# Altium PCB STM_BLUEPILL.PcbDoc
Units mm, origin at the board's own origin, x right, y up, seen from the top; angles counter-clockwise.
Board outline 53.31 x 22.32 mm, 4 copper layers (Top Layer 1, Top Layer, Bottom Layer, Bottom Layer 1), stack 1.57 mm thick; 29 components, 49 nets, 158 pads, 33 vias.
Unrouted connection lines stored in the file: 12.
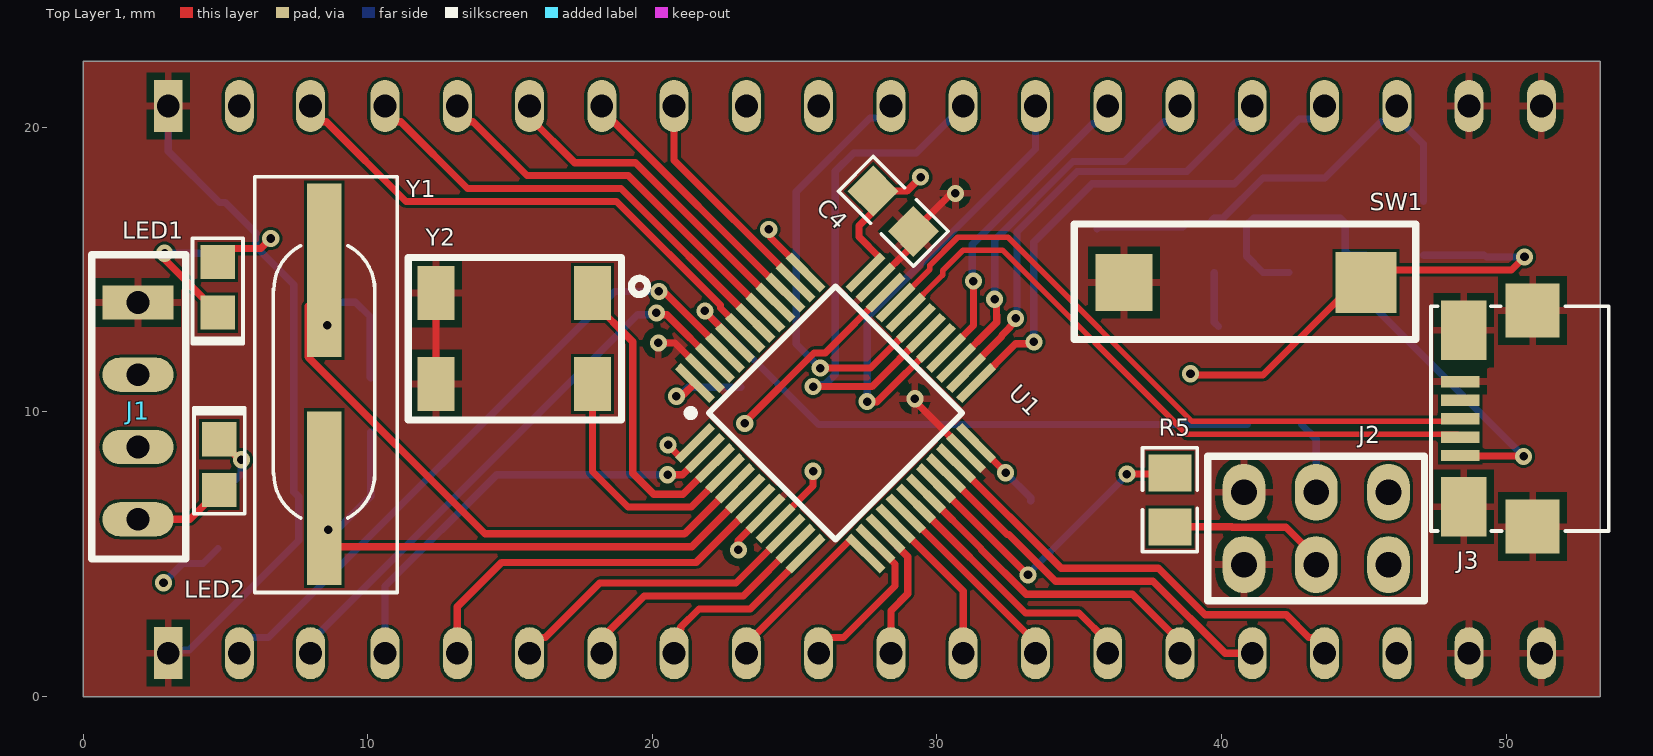
[diagram p0: Top Layer 1 view]
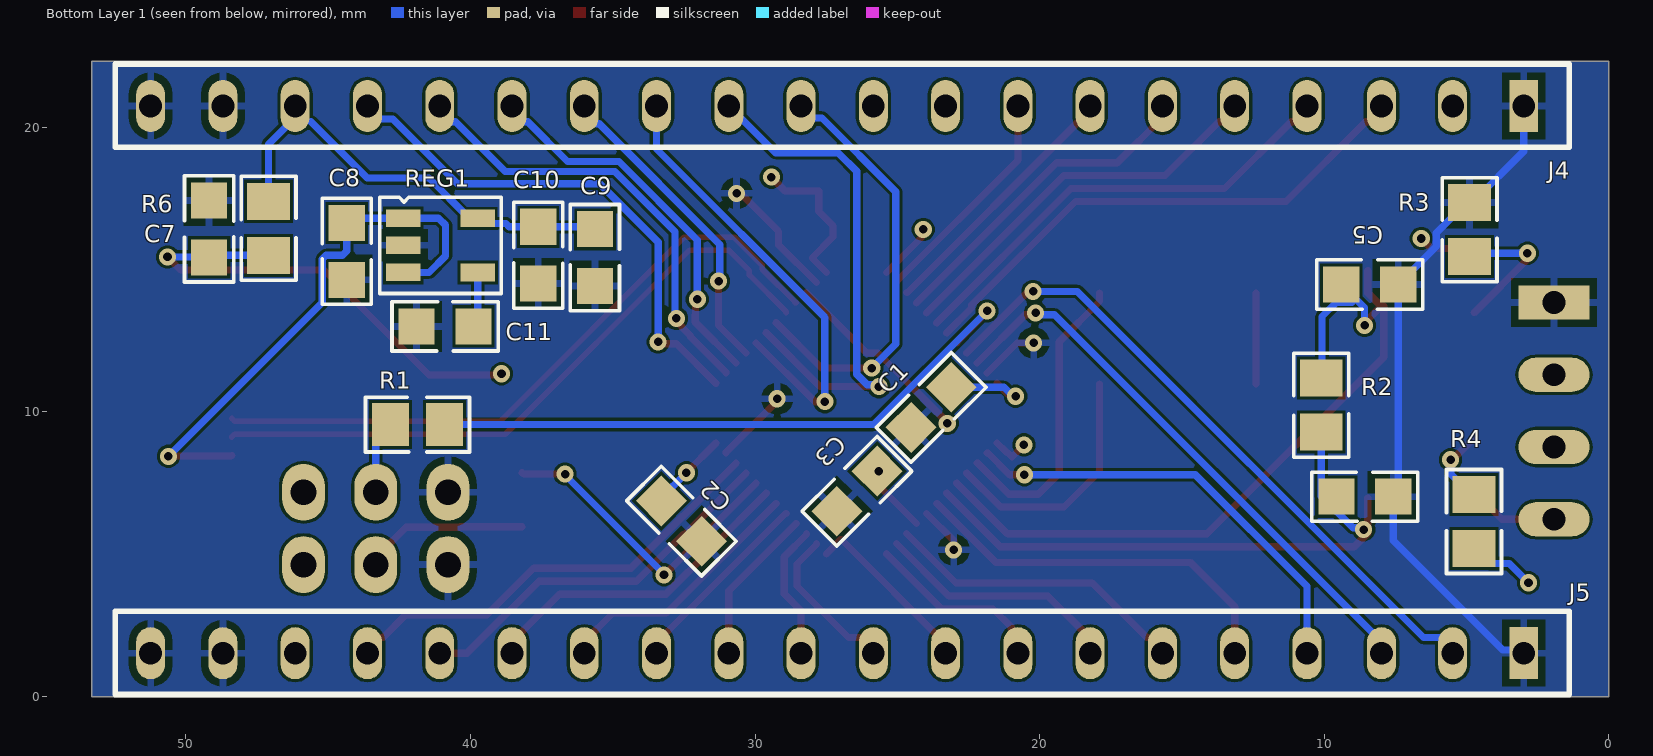
[diagram p1: Bottom Layer 1 view, seen from below]
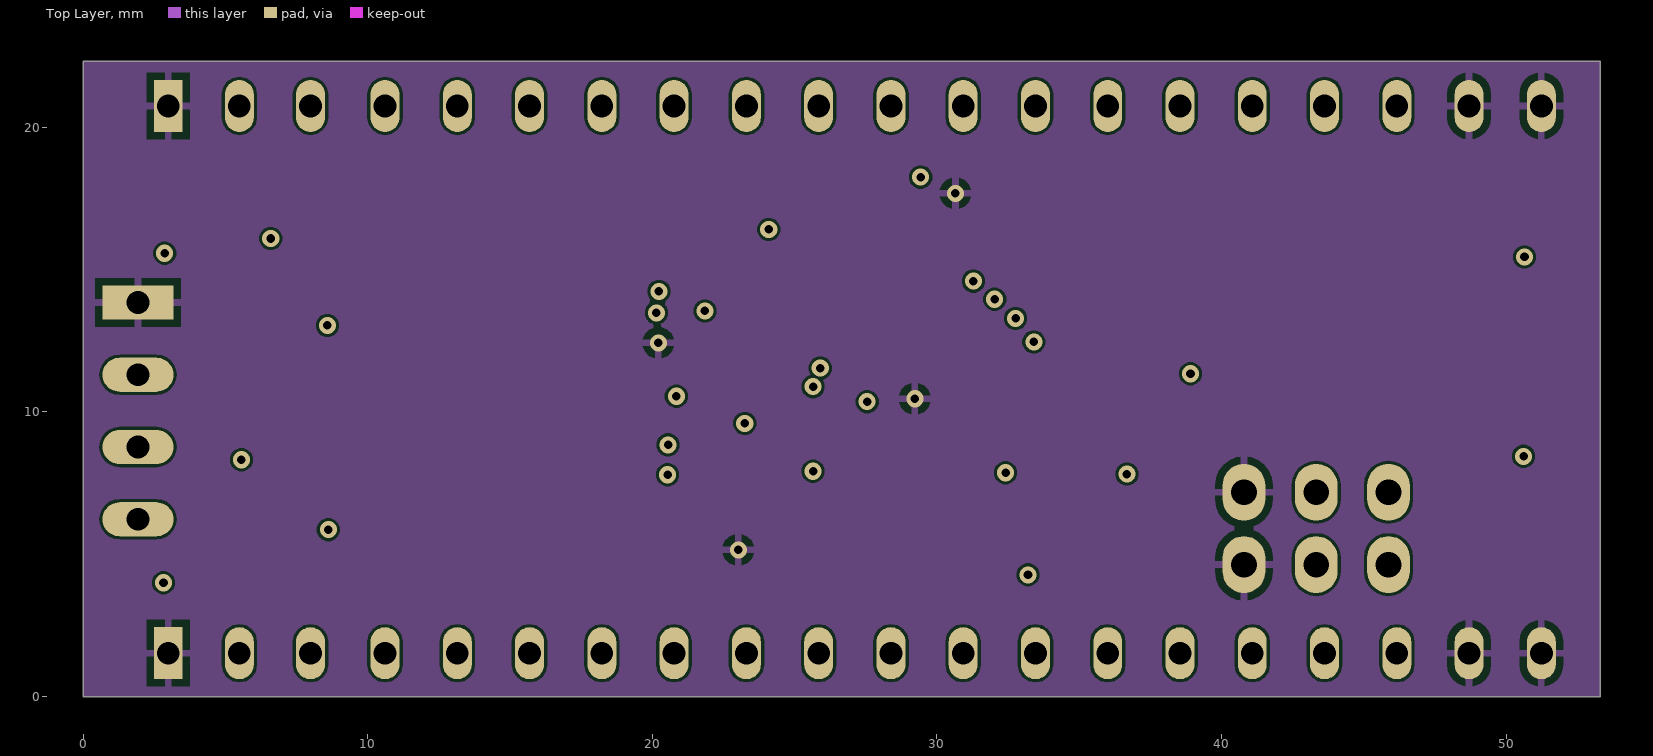
[diagram p2: Top Layer]
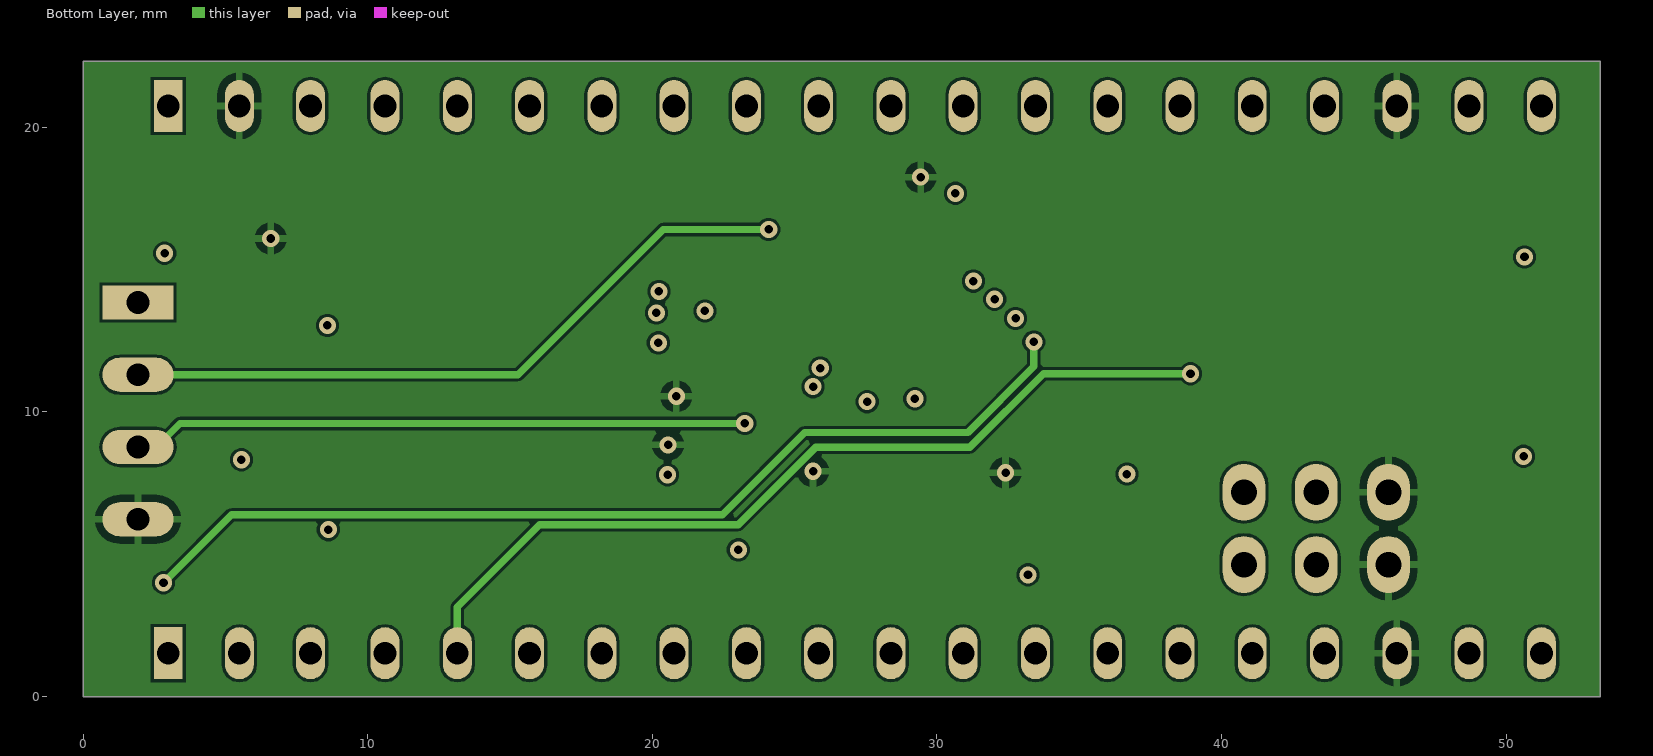
[diagram p3: Bottom Layer]
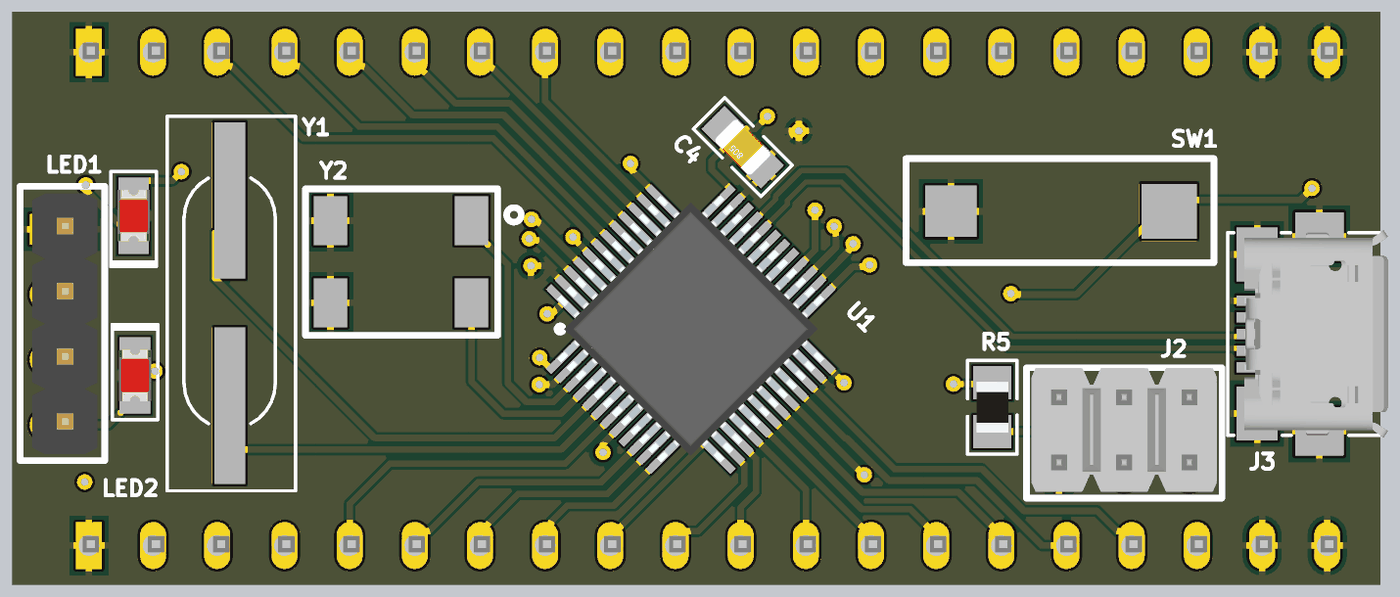
[diagram p4: 3D render of the assembled board from above, using the file's embedded part models]
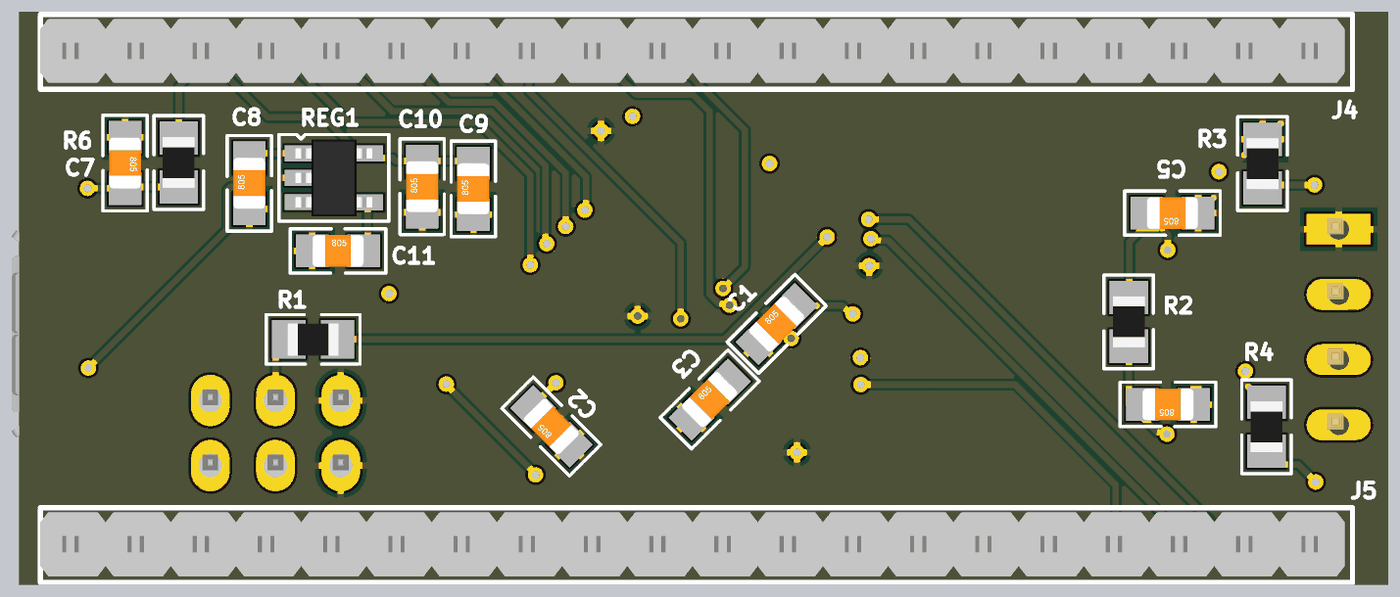
[diagram p5: 3D render of the assembled board from below, using the file's embedded part models]

## Layer stack, top to bottom
Top Solder: solder mask 0.0102, Solder Resist, Dk 3.5
Top Layer 1: signal copper 0.035
Dielectric 2: prepreg 0.0994, PP-006, Dk 4.1
Top Layer: signal copper 0.018
Dielectric 1: dielectric 1.265, FR-4, Dk 4.8
Bottom Layer: signal copper 0.018
Dielectric 3: prepreg 0.0994, PP-006, Dk 4.1
Bottom Layer 1: signal copper 0.035
Bottom Solder: solder mask 0.0102, Solder Resist, Dk 3.5

## Board outline
0,0 53.309,0 53.309,22.324 0,22.324

## Design rules (kind name [scope] priority, off if disabled: settings)
Clearance [All] p1: gap=0.1 ignorepadtopadclearanceinfootprint=TRUE
DiffPairsRouting DiffPair_90DiffPairsRouting [InDifferentialPairClass('DII90')] p1: maxlimit=0.254 minlimit=0.254 mostfreqgap=0.254 toplayer_minwidth=0.2 toplayer_maxwidth=0.2 toplayer_prefwidth=0.2 midlayer1_minwidth=0.2 midlayer1_maxwidth=0.2 midlayer1_prefwidth=0.2 midlayer2_minwidth=0.2 midlayer2_maxwidth=0.2 midlayer2_prefwidth=0.2 bottomlayer_minwidth=0.2 bottomlayer_maxwidth=0.2 bottomlayer_prefwidth=0.2 maxuncoupledlength=12.7
DiffPairsRouting [All] p2: maxlimit=0.254 minlimit=0.254 mostfreqgap=0.254 toplayer_minwidth=0.381 toplayer_maxwidth=0.381 toplayer_prefwidth=0.381 midlayer1_minwidth=0.381 midlayer1_maxwidth=0.381 midlayer1_prefwidth=0.381 midlayer2_minwidth=0.381 midlayer2_maxwidth=0.381 midlayer2_prefwidth=0.381 bottomlayer_minwidth=0.381 bottomlayer_maxwidth=0.381 bottomlayer_prefwidth=0.381 maxuncoupledlength=12.7
MatchedLengths DiffPair_90MatchedLengths [InDifferentialPairClass('DII90')] p1: tolerance=25.4 checknetsindiffpair=FALSE checkdiffpairvsdiffpair=TRUE checkxsignals=TRUE checkothers=TRUE
MinimumSolderMaskSliver [All] p1: minsoldermaskwidth=0.01
PolygonConnect [All] p1: connectstyle=Relief reliefconductorwidth=0.254 reliefentries=4 polygonreliefangle="90 Angle" airgapwidth=0.254
RoutingVias [All] p1: holewidth=0.3 width=0.6 viastyle="Through Hole" minholewidth=0.3 minwidth=0.6 maxholewidth=0.3 maxwidth=0.6
SilkToSilkClearance [All] p1: silktosilkclearance=0.1
SilkToSolderMaskClearance [IsPad] p1: minsilkscreentomaskgap=0.01 clearancetoexposedcopper=TRUE
SolderMaskExpansion [All] p1: expansion=0.102 istentingtop=FALSE
Width ALL [All] p1: maxlimit=0.254 minlimit=0.254 preferedwidth=0.254
Width 3.3V [InNet('+3V3')] p2: maxlimit=0.3 minlimit=0.3 preferedwidth=0.3
Width 5V [InNet('+5V')] p3: maxlimit=0.4 minlimit=0.4 preferedwidth=0.4 checkconnectedcopper=TRUE
26 further rules are at their usual default settings.

## Classes and differential pairs
differential pair class DII90: D
component class "[2]- Connector_Page": C8 C9 C10 C11 J3 J4 J5 REG1
component class [1]-Controller_Page: C1 C2 C3 C4 C5 C7 J1 J2 LED1 LED2 R1 R2 R3 R4 R5 R6 SW1 U1 Y1 Y2
differential pair D: +D_P -D_N

## Components (designator, comment, footprint, x,y, rotation, side; value= is the part's Value field where it differs from the comment)
C1 "0.1uF" CAP_0805 23.811,10.163 r135 bottom
C2 "0.1uF" CAP_0805 32.587,6.165 r45 bottom
C3 "0.1uF" CAP_0805 26.419,7.217 r135 bottom
C4 "0.1uF" CAP_0805 28.466,17.055 r135 top
C5 "22pF" CAP_0805 8.397,14.481 r0 bottom
C6 "22pF" CAP_0805 8.57,7.024 r0 bottom
C7 "0.1uF" CAP_0805 49.188,16.434 r270 bottom
C8 "0.1uF" CAP_0805 44.348,15.645 r90 bottom
C9 "0.1uF" CAP_0805 35.626,15.428 r90 bottom
C10 "1uF" CAP_0805 37.618,15.512 r90 bottom
C11 "22pF" CAP_0805 40.895,13.008 r180 bottom
J1 "4X1 Bergstrip" CON4_100_40D72_TH_ST_MALE 1.922,13.849 r0 top
J2 "2X3 Berg Strip" CON6_100_59D78_TH_ST_DUPLICATE 45.87,7.178 r180 top
J3 "MICRO USB2.0" CON_10118192-0001LF_SMD 49.663,9.769 r90 top
J4 "20X1 Bergstrip" CON20_100_40D72_TH_ST 2.983,20.756 r270 bottom
J5 "20X1 Bergstrip" CON20_100_40D72_TH_ST 2.983,1.522 r270 bottom
LED1 "RED LED" LED_0805 4.724,14.381 r90 top
LED2 "RED LED" LED_0805 4.779,8.151 r270 top
R1 "10K" RES_0805 41.864,9.559 r180 bottom
R2 "10Mohm" RES_0805 10.1,10.242 r90 bottom
R3 "1K" RES_0805 4.889,16.41 r90 bottom
R4 "1K" RES_0805 4.733,6.151 r270 bottom
R5 "10K" RES_0805 38.189,6.913 r90 top
R6 "10K" RES_0805 47.099,16.455 r270 bottom
REG1 "RT9193-33GB" SOT23-5 41.056,15.854 r270 bottom
SW1 "TACT SWITCH" SW_342_SMD 36.578,14.551 r180 top
U1 "STM32F103C8T6" LQFP-48_19.6_393_58X11_SMD 26.437,9.962 r45 top
Y1 "8MHz" XTAL_314_240X47_SMD 8.468,14.976 r270 top
Y2 "32.768KHz" "XTAL_MC-405 32.7680K-G3" 17.895,10.984 r180 top

## Footprints (in the part's own frame and the unit in brackets; to place one, negate y for a bottom-side part, rotate by r counter-clockwise, add the part's x,y. Pads: shape width x height; smd on the part's side, far side on the other; paste and mask are expansions set on the pad)
CAP_0805 [mm] "Ceramic Capacitor"
  rect 1.27x1.27 smd mask+0.076: 1(-1,0) 2(1,0)
  silkscreen extent -1.86,-0.86 1.86,0.86, body extent -1,-0.62 1,0.63, height 0.78
CON4_100_40D72_TH_ST_MALE [mm] "Berg Strip"
  rect 2.5x1.2 hole 0.8: 1(0,0)
  oval 2.5x1.2 hole 0.8: 2(0,-2.54) 3(0,-5.08) 4(0,-7.62)
  silkscreen extent -1.63,-9.02 1.68,1.68, body extent -1.14,-8.76 1.4,1.4, height 8.55
CON6_100_59D78_TH_ST_DUPLICATE [mm] "Berg strip"
  oval 1.5x2 hole 0.9: 1(0,0) 2(0,2.54) 3(2.54,0) 4(2.54,2.54) 5(5.08,0) 6(5.08,2.54)
  silkscreen extent -1.27,-1.27 6.35,3.81, body extent -1.07,-1.27 6.15,3.56, height 8.18
CON20_100_40D72_TH_ST [mil] "Berg strip"
  rect 72x40 hole 31.5: 1(0,0)
  oval 72x40 hole 31.5: 2(0,-98.43) 3(0,-196.85) 4(0,-300) 5(0,-400) 6(0,-500) 7(0,-600) 8(0,-700) 9(0,-800) 10(0,-900) 11(0,-1000) 12(0,-1100) 13(0,-1200) 14(0,-1300) 15(0,-1400) 16(0,-1500) 17(0,-1600) 18(0,-1700) 19(0,-1800) 20(0,-1900)
  silkscreen extent -58,-1949 57,63, body extent -51,-1949 47,51, height 323
CON_10118192-0001LF_SMD [mm] "USB2.0 MICRO"
  rect 0.4x1.35 smd: 1(-1.3,1.275) 2(-0.65,1.275) 3(0,1.275) 4(0.65,1.275) 5(1.3,1.275)
  rect 2.1x1.6 smd: 6(-3.1,1.15) 7(3.1,1.15)
  rect 1.9x1.9 smd: 8(-3.8,-1.275) 9(3.8,-1.275)
  silkscreen extent -3.95,-3.94 3.95,2.3, body extent -4.04,-3.94 4.04,1.66, height 2.81
LED_0805 [mm] "LED"
  rect 1.2x1.2 smd mask+0.076: A(0.889,0) K(-0.889,0)
  silkscreen extent -1.99,-0.89 1.73,0.89, body extent -1.01,-0.62 1.01,0.63, height 1.1
LQFP-48_19.6_393_58X11_SMD [mm] "48LQFP"
  rect 1.7x0.3 smd mask+0.076: 1(-4.238,2.75) 2(-4.238,2.25) 3(-4.238,1.75) 4(-4.238,1.25) 5(-4.238,0.75) 6(-4.238,0.25) 7(-4.238,-0.25) 8(-4.238,-0.75) 9(-4.238,-1.25) 10(-4.238,-1.75) 11(-4.238,-2.25) 12(-4.238,-2.75) 25(4.238,-2.75) 26(4.238,-2.25) 27(4.238,-1.75) 28(4.238,-1.25) 29(4.238,-0.75) 30(4.238,-0.25) 31(4.238,0.25) 32(4.238,0.75) 33(4.238,1.25) 34(4.238,1.75) 35(4.238,2.25) 36(4.238,2.75)
  rect 0.3x1.7 smd mask+0.076: 13(-2.75,-4.238) 14(-2.25,-4.238) 15(-1.75,-4.238) 16(-1.25,-4.238) 17(-0.75,-4.238) 18(-0.25,-4.238) 19(0.25,-4.238) 20(0.75,-4.238) 21(1.25,-4.238) 22(1.75,-4.238) 23(2.25,-4.238) 24(2.75,-4.238) 37(2.75,4.238) 38(2.25,4.238) 39(1.75,4.238) 40(1.25,4.238) 41(0.75,4.238) 42(0.25,4.238) 43(-0.25,4.238) 44(-0.75,4.238) 45(-1.25,4.238) 46(-1.75,4.238) 47(-2.25,4.238) 48(-2.75,4.238)
  silkscreen extent -3.72,-3.15 3.15,3.72, body extent -4.5,-4.5 4.5,4.5, height 1.7
RES_0805 [mm] "Resister"
  rect 1.3x1.5 smd mask+0.076: 1(0.95,0) 2(-0.95,0)
  silkscreen extent -1.83,-0.97 1.83,0.97, body extent -1,-0.63 1,0.62, height 0.5
SOT23-5 [mm] "CASE: SOT"
  rect 0.62x1.22 smd mask+0.076: 1(-0.953,-1.31) 2(-0.003,-1.31) 3(0.947,-1.31) 4(0.952,1.31) 5(-0.953,1.31)
  silkscreen extent -1.69,-2.14 1.69,2.14, body extent -1.5,-1.5 1.5,1.5, height 1.41
SW_342_SMD [mm] "CASE: SMD"
  rect 2x2 smd: 1(0,0)
  rect 2.15x2.15 smd: 2(-8.5,0)
  silkscreen extent -10.25,-2.06 1.75,2, body extent -7.17,-1.79 -1.17,1.71, height 2.4
XTAL_314_240X47_SMD [mm] "CASE: TH"
  rect 6.096x1.2 smd: 1(0,0) 2(8,0)
  silkscreen extent -3.29,-2.44 11.32,2.57, body extent -2.99,-2.27 10.9,2.41, height 3.05
"XTAL_MC-405 32.7680K-G3" [mm] "Crystal"
  rect 1.3x1.9 smd: 1(0,-3.2) 2(5.5,-3.2) 3(5.5,0) 4(0,0)
  silkscreen extent -1.93,-4.44 6.48,1.27, body extent -1.02,-4.44 6.48,1.27, height 3.6

## Part data
C1 C2 C3 C4 C7 C8 C9: library part CAP_0.1uF-50V-5%-0805, "0.1µF ±5% 50V Ceramic Capacitor X7R 0805 (2012 Metric)", Case/Package="0805 (2012 Metric)", Manufacturer=KEMET, Manufacturing Part Number=C0805C104J5RACTU, Supplier Part Number-1=399-1171-1-ND, Supplier-1=Digikey
C5 C6 C11: library part CAP_22pF-50V-5%-0805, "22pF ±5% 50V Ceramic Capacitor C0G, NP0 0805 (2012 Metric)", Case/Package=0805, Manufacturer=KEMET, Manufacturer Part Number=C0805C220J5GACTU, Supplier Part Number-1=399-1113-1-ND, Supplier-1=Digikey
C10: library part CAP_1uF-50V-5%-0805, "1µF ±5% 50V Ceramic Capacitor X7R 0805 (2012 Metric)", Case/Package="0805 (2012 Metric)", Manufacturer=Yageo, Manufacturing Part Number=CC0805JKX7R9BB105, Supplier Part Number-1=311-3498-1-ND, Supplier-1=Digikey
J1: library part CON-BS-PLG_4X1-100-TH-ST, "4 pin, 1 row, 2.54mm pitch bergstrip", Case/Package=TH, Manufacturer=NA, Manufacturing Part Number=NA, Supplier Part Number-1=NA, Supplier-1=NA
J2: library part CON-BS-PLG_2X3-100-TH-ST, "6 pin, 2 row, 2.54mm pitch bergstrip", Case/Package=TH, Manufacturer=NA, Manufacturer Part Number=NA, Supplier Part Number-1=NA, Supplier-1=NA
J3: library part CON-USB_10118192-0002LF-SMD, "USB - micro B USB 2.0 Receptacle Connector 5 Position Surface Mount, Right Angle", Case/Package=SMD, Manufacturer="Amphenol ICC (FCI)", Manufacturing Part Number=10118192-0002LF, Supplier Part Number-1=609-5379-1-ND, Supplier-1=Digikey
J4 J5: library part CON-BS-PLG_20X1-100-TH-ST, "20 pin, 1 row, 2.54mm pitch bergstrip", Case/Package=TH, Manufacturer=NA, Manufacturing Part Number=NA, Supplier Part Number-1=NA, Supplier-1=NA
LED1 LED2: library part LED-RED_10mA-0805, "Red 621nm LED Indication - Discrete 2V 0805 (2012 Metric)", Case/ Package=0805, Manufacturer="Lite-On Inc.", Manufacturer Part Number=LTST-C170EKT, Supplier Part Number-1=160-1178-1-ND, Supplier-1=Digikey
R1 R5 R6: library part RES_10K-0.125W-1%-0805, "10 kOhms ±1% 0.125W, 1/8W Chip Resistor 0805 (2012 Metric) Moisture Resistant Thick Film", Case/Package=0805, Manufacturer=Yageo, Manufacturing Part Number=RC0805FR-0710KL, Supplier Part Number-1=311-10.0KCRCT-ND, Supplier-1=Digikey
R2: library part RES_10MOHM-0.125W-1%-0805, "10 MOhms ±1% 0.125W, 1/8W Chip Resistor 0805 (2012 Metric) Automotive AEC-Q200, High Voltage Thick Film", Case/Package="0805 (2012 Metric)", Manufacturer="Rohm Semiconductor", Manufacturing Part Number=KTR10EZPF1005, Supplier Part Number-1=RHM10.0MAHCT-ND, Supplier-1=Digikey
R3 R4: library part RES_1K-0.125W-1%-0805, "1 kOhms ±1% 0.125W, 1/8W Chip Resistor 0805 (2012 Metric) Moisture Resistant Thick Film", Case/Package=0805, Manufacturer=垈㎵á, Manufacturer Part Number=RC0805FR-071KL, Supplier Part Number-1=311-1.00KCRCT-ND, Supplier-1=Digikey
REG1: library part REG_3.3V-5.5V-0.3A-SOT-23-5, "Linear Voltage Regulator IC 1 Output 300mA SOT-23-5", Case/ Package=SOT-23-5, Manufacturer="Richtek USA Inc.", Supplier Part Number-1=1028-1014-1-ND, Manufacturer Part Number=RT9193-33GB, Supplier-1=Digikey
SW1: library part SW_KSR223GLFG-SMD, "Tactile Switch SPST-NO Top Actuated Surface Mount", Case/Package=SMD, Manufacturer=C&K, Manufacturing Part Number=KSR223GLFG, Supplier Part Number-1=401-1704-1-ND, Supplier-1=Digikey
U1: library part "IC-STM32F103C8T6 _1", "ARM® Cortex®-M3 STM32F1 Microcontroller IC 32-Bit 72MHz 64KB (64K x 8) FLASH", Case/Package=48-LQFP, Manufacturer=STMicroelectronics, Supplier Part Number-1=497-6063-ND, Manufacturer Part Number=STM32F103C8T6, Supplier-1=Digikey
Y1: library part XTAL_8MHZ-LFXTAL030234, "Crystals 8MHz 22pF -20C 70C", Case/Package=SMD, Manufacturer="IQD Frequency Products", Manufacturing Part Number=LFXTAL030234Reel, Supplier Part Number-1=449-LFXTAL030234REEL, Supplier-1=Mouser
Y2: library part "XTAL_32.768KHz-MC-405 32.7680K-G3", "Crystals SMD AT XTL MHZ +/-50PPM 12.5 PF 250 T/R", Case/Package=SMD, Manufacturer=Epson, Manufacturing Part Number="MC-405 32.7680K-G3: ROHS", Supplier Part Number-1=732-MC405327680KG3RS, Supplier-1=Mouser

## Via types
v1: diameter 0.6, hole 0.3, Top Layer 1 to Bottom Layer 1, 33 vias

## Nets (pads, with @x,y where several pads share a name; then routed paths per layer and width w, separated by ;. In a path a pad name is that pad's centre, name@x,y a point inside that pad or via, vN(x,y) a via of type N, cw(c..) or ccw(c..) an arc to the next point about the centre after c; other vN are vias at no path point)
+3V3: C1.2 C2.2 C3.2 C4.2 C9.2 C10.2 J1.4 J2.1 J2.2 J4.2 J4.18 J5.18 LED1.A LED2.A R6.2 REG1.5 U1.1 U1.9 U1.24 U1.36 U1.48 | length 36
  Top Layer 1 w0.254: J1.4 3.746,6.229 LED2.A ; LED1.A 5.197,15.743 6.232,15.743 v1(6.586,16.097) ; v1(20.549,8.845) 20.974,8.42 21.126,8.573 21.159,8.573 U1.1 ; v1(20.842,10.553) 20.908,10.619 21.101,10.619 U1.48 ; U1.9 25.645,7.402 v1(25.645,7.918) ; U1.36 27.984,15.398 27.984,15.431 27.257,16.158 27.257,16.542 27.759,17.044 C4.2 28.935,17.762 v1(29.427,18.254) ; U1.24 31.378,8.904 32.411,7.872 v1(32.411,7.866)
  Bottom Layer 1 w0.254: v1(20.842,10.553) 20.936,10.553 21.253,10.87 C1.2 ; v1(32.411,7.866) 33.294,6.983 C2.2 ; C9.2 35.71,16.512 C10.2 38.639,16.512 38.755,16.628 39.568,16.628 REG1.5 40.046,16.807 41.461,18.221 43.628,18.221 45.611,20.204 ; J4.18 46.163,20.35 47.099,19.414 R6.2
+5V: C8.2 J3.1 REG1.1 REG1.3 | length 19.8
  Top Layer 1 w0.254: J3.1 48.401,8.456 50.604,8.456 v1(50.618,8.442)
  Bottom Layer 1 w0.254: REG1.3 41.458,14.907 40.875,15.49 40.875,16.56 41.122,16.807 REG1.1 44.187,16.807 C8.2 44.348,15.656 44.497,15.507 45.077,15.507 45.21,15.374 45.21,13.85 v1(50.618,8.442)
BOOT0: J2.3 R1.2 | length 2.6
  Bottom Layer 1 w0.254: R1.2 43.33,9.043 J2.3
BOOT1: J2.4 R5.2 | length 5.8
  Top Layer 1 w0.254: R5.2 40.365,5.963 40.377,5.951 42.267,5.951 43.33,4.888 J2.4
D_N: J3.2 U1.32 | length 23.2
  Top Layer 1 w0.2: U1.32 28.903,13.522 30.199,14.818 30.199,14.966 30.922,15.689 32.306,15.689 38.778,9.217 48.29,9.217 J3.2
D_P: J3.3 U1.33 | length 23.6
  Top Layer 1 w0.2: U1.33 28.582,13.843 29.745,15.006 29.745,15.154 30.734,16.143 32.494,16.143 38.966,9.671 48.29,9.671 J3.3
GND: C1.1 C2.1 C3.1 C4.1 C5.1 C6.1 C7.1 C8.1 C9.1 C10.1 C11.1 J1.1 J2.5 J2.6 J3.5 J3.6 J3.7 J3.8 J3.9 J4.1 J4.19 J4.20 J5.1 J5.19 J5.20 R3.1 REG1.2 SW1.1 U1.8 U1.23 U1.35 U1.47 Y2.2 Y2.3 | length 37.5
  Top Layer 1 w0.254: Y2.3 Y2.2 ; v1(20.21,12.429) 20.214,12.425 20.792,12.425 U1.47 ; v1(23.02,5.154) 23.02,5.484 U1.8 ; U1.35 29.173,15.88 C4.1 30.51,17.685 v1(30.65,17.685) ; v1(29.224,10.466) 29.224,10.39 31.025,8.589 U1.23
  Bottom Layer 1 w0.254: J5.1 3.098,1.637 3.723,1.637 7.57,5.484 C6.1 7.397,7.197 C5.1 6.059,15.819 6.059,16.29 4.989,17.36 R3.1 4.789,17.36 2.983,19.166 J4.1
NetC11_2: C11.2 REG1.4 | length 2
  Bottom Layer 1 w0.254: REG1.4 39.746,13.157 C11.2
NetLED1_K: LED1.K R3.2 | length 4.9
  Top Layer 1 w0.254: v1(2.86,15.58) 2.849,15.569 2.849,15.367 LED1.K
  Bottom Layer 1 w0.254: v1(2.86,15.58) 4.769,15.58 R3.2
NetLED2_K: LED2.K R4.2 | length 2.4
  Top Layer 1 w0.254: LED2.K 5.497,8.322 v1(5.556,8.322)
  Bottom Layer 1 w0.254: R4.2@4.926,7.302 5.026,7.302 5.549,7.825 5.549,8.315 v1(5.556,8.322)
NetR1_1: R1.1 U1.44 | length 22.3
  Top Layer 1 w0.254: v1(21.847,13.551) 21.847,13.521 22.91,12.458 U1.44
  Bottom Layer 1 w0.254: v1(21.847,13.551) 25.839,9.559 R1.1
NetR5_1: R5.1 U1.20 | length 11.1
  Top Layer 1 w0.254: U1.20 33.183,4.277 v1(33.201,4.277) ; v1(36.678,7.817) 38.143,7.817 R5.1
  Bottom Layer 1 w0.254: v1(33.201,4.277) 33.201,4.309 36.678,7.785 v1(36.678,7.817)
NRST: C7.2 J5.5 R6.1 SW1.2 U1.7 | length 61.3
  Top Layer 1 w0.254: J5.5 13.143,3.154 14.704,4.715 21.544,4.715 U1.7 ; v1(38.912,11.345) 38.953,11.304 41.462,11.304 45.152,14.994 50.195,14.994 v1(50.65,15.449)
  Bottom Layer w0.254: J5.5 13.143,3.149 16.032,6.038 23.02,6.038 25.741,8.759 31.157,8.759 33.743,11.345 v1(38.912,11.345)
  Bottom Layer 1 w0.254: R6.1 C7.2@49.223,15.505 ; C7.2@49.317,15.449 v1(50.65,15.449)
PA0: J5.6 U1.10 | length 10.9
  Top Layer 1 w0.254: J5.6 15.683,1.722 16.035,2.074 16.235,2.074 18.148,3.987 22.937,3.987 U1.10
PA1: J5.7 U1.11 | length 8.7
  Top Layer 1 w0.254: J5.7 18.223,2.045 19.711,3.533 23.19,3.533 U1.11
PA2: J5.8 U1.12 | length 6.5
  Top Layer 1 w0.254: J5.8 20.763,2.135 20.998,2.37 20.998,2.442 21.635,3.079 23.443,3.079 U1.12
PA3: J5.9 U1.13 | length 6.2
  Top Layer 1 w0.254: J5.9 23.303,1.857 26.962,5.516 26.994,5.516 U1.13
PA4: J5.10 U1.14 | length 5.6
  Top Layer 1 w0.254: J5.10 25.843,1.722 26.195,2.074 26.717,2.074 28.523,3.88 28.523,4.661 27.843,5.342 U1.14
PA5: J5.11 U1.15 | length 4.8
  Top Layer 1 w0.254: U1.15 28.196,5.695 28.977,4.914 28.977,3.609 28.383,3.015 J5.11
PA6: J5.12 U1.16 | length 5.5
  Top Layer 1 w0.254: U1.16 30.923,3.708 J5.12
PA7: J5.13 U1.17 | length 6.8
  Top Layer 1 w0.254: U1.17 28.93,6.435 33.463,1.902 J5.13
PA8: J4.13 U1.29 | length 16.1
  Top Layer 1 w0.254: v1(27.548,10.362) 27.898,10.362 U1.29
  Bottom Layer 1 w0.254: v1(27.548,10.362) 27.548,13.326 33.463,19.241 J4.13
PA9: J4.12 U1.30 | length 18.3
  Top Layer 1 w0.254: v1(25.646,10.891) 27.72,10.891 U1.30
  Bottom Layer 1 w0.254: v1(25.646,10.891) 25.713,10.957 26.058,10.957 26.426,11.326 26.426,18.459 27.073,19.106 29.273,19.106 J4.12
PA10: J4.11 U1.31 | length 15.2
  Top Layer 1 w0.254: v1(25.899,11.544) 27.665,11.544 U1.31
  Bottom Layer 1 w0.254: v1(25.899,11.544) 25.054,12.389 25.054,17.737 27.65,20.333 28.031,20.333 28.383,20.685 J4.11
PA11: J4.10
PA12: J4.9
PA15: J4.8 U1.38 | length 8
  Top Layer 1 w0.254: J4.8 20.763,18.851 25.031,14.582 U1.38
PB0: J5.14 U1.18 | length 9.2
  Top Layer 1 w0.254: U1.18 33.11,2.935 34.996,2.935 36.003,1.928 J5.14
PB1: J5.15 U1.19 | length 11.5
  Top Layer 1 w0.254: U1.19 31.552,5.2 31.552,5.18 33.137,3.596 36.875,3.596 38.543,1.928 J5.15
PB3: J4.7 U1.39 | length 9.3
  Top Layer 1 w0.254: J4.7 18.223,20.556 18.575,20.204 18.638,20.204 24.645,14.196 U1.39
PB4: J4.6 U1.40 | length 11.7
  Top Layer 1 w0.254: J4.6 15.683,20.35 17.27,18.763 19.404,18.763 U1.40
PB5: J4.5 U1.41 | length 14
  Top Layer 1 w0.254: J4.5 13.143,20.556 13.495,20.204 13.695,20.204 15.59,18.309 19.151,18.309 U1.41
PB6: J4.4 U1.42 | length 16.3
  Top Layer 1 w0.254: J4.4 10.603,20.556 10.955,20.204 11.155,20.204 13.504,17.855 18.898,17.855 U1.42
PB7: J4.3 U1.43 | length 18.8
  Top Layer 1 w0.254: J4.3 7.983,20.556 8.335,20.204 8.535,20.204 11.338,17.401 18.742,17.401 22.393,13.75 22.393,13.652 U1.43
PB8: J5.2 U1.45 | length 23.4
  Top Layer 1 w0.254: v1(20.229,14.238) 20.295,14.172 20.459,14.172 U1.45
  Bottom Layer 1 w0.254: J5.2 5.483,1.722 5.835,2.074 6.509,2.074 18.673,14.238 v1(20.229,14.238)
PB9: J5.3 U1.46 | length 20.1
  Top Layer 1 w0.254: v1(20.141,13.484) 20.207,13.418 20.506,13.418 U1.46
  Bottom Layer 1 w0.254: J5.3 7.983,1.928 19.472,13.418 20.075,13.418 v1(20.141,13.484)
PB10: J5.16 U1.21 | length 13.4
  Top Layer 1 w0.254: U1.21 32.47,5.696 32.527,5.696 34.168,4.055 37.597,4.055 40.13,1.522 J5.16
PB11: J5.17 U1.22 | length 15.8
  Top Layer 1 w0.254: U1.22 34.365,4.509 37.785,4.509 39.422,2.872 42.273,2.872 43.071,2.074 43.271,2.074 43.623,1.722 J5.17
PB12: J4.17 R4.1 U1.25 | length 55.4
  Top Layer 1 w0.254: U1.25 32.759,12.395 33.34,12.395 v1(33.406,12.461)
  Bottom Layer w0.254: v1(2.817,3.998) 5.211,6.392 22.461,6.392 25.344,9.275 31.083,9.275 33.406,11.598 v1(33.406,12.461)
  Bottom Layer 1 w0.254: v1(2.817,3.998) 3.497,4.678 4.21,4.678 R4.1 ; v1(33.406,12.461) 33.406,15.969 35.458,18.021 40.46,18.021 42.734,20.295 43.271,20.295 43.623,20.647 J4.17
PB13: J4.16 U1.26 | length 15.9
  Top Layer 1 w0.254: U1.26 31.025,11.4 32.267,12.643 32.267,12.676 32.558,12.966 32.558,12.987 32.765,13.194 v1(32.765,13.288)
  Bottom Layer 1 w0.254: v1(32.765,13.288) 32.813,13.336 32.813,16.332 34.931,18.45 38.777,18.45 40.531,20.204 40.731,20.204 41.083,20.556 J4.16
PB14: J4.15 U1.27 | length 13.5
  Top Layer 1 w0.254: U1.27 32.104,13.154 32.104,13.408 32.095,13.417 32.095,13.896 v1(32.029,13.962)
  Bottom Layer 1 w0.254: v1(32.029,13.962) 32.029,16.049 34.784,18.804 36.591,18.804 37.991,20.204 38.191,20.204 38.543,20.556 J4.15
PB15: J4.14 U1.28 | length 11.1
  Top Layer 1 w0.254: U1.28 31.282,13.039 v1(31.282,14.599)
  Bottom Layer 1 w0.254: v1(31.282,14.599) 31.237,14.644 31.237,15.888 35.476,20.127 35.574,20.127 36.003,20.556 J4.14
PC13: J5.4 U1.2 | length 15.5
  Top Layer 1 w0.254: v1(20.533,7.795) 21.055,7.795 21.817,8.556 U1.2
  Bottom Layer 1 w0.254: J5.4 10.603,3.872 14.526,7.795 v1(20.533,7.795)
SWCLK: J1.2 U1.37 | length 26.3
  Top Layer 1 w0.254: v1(24.088,16.415) 24.154,16.349 24.154,16.134 U1.37
  Bottom Layer w0.254: J1.2 15.274,11.309 20.38,16.415 v1(24.088,16.415)
SWDIO: J1.3 U1.34 | length 28.5
  Top Layer 1 w0.254: v1(23.246,9.598) 23.246,9.636 25.681,12.071 26.071,12.071 U1.34
  Bottom Layer w0.254: J1.3 2.572,8.769 3.401,9.598 v1(23.246,9.598)
XTALA: C5.2 R2.1 U1.5 Y1.1 | length 27.2
  Top Layer 1 w0.254: Y1.1 8.468,14.189 Y1.1@7.995,13.716 ; v1(8.578,13.041) 8.578,13.133 Y1.1@7.995,13.716 ; U1.5 21.132,5.718 14.113,5.718 7.903,11.928 Y1.1@7.903,13.716 ; Y1.1@7.903,13.716 Y1.1@7.995,13.716 ; Y1.1@7.903,13.716 Y1.1@7.995,13.716
  Bottom Layer 1 w0.254: v1(8.578,13.041) 8.58,13.043 8.58,13.664 C5.2@8.897,13.981 ; C5.2@9.017,13.861 9.564,13.861 10.072,13.353 10.072,11.22 R2.1
XTALB: C6.2 R2.2 U1.6 Y1.2 | length 21.4
  Top Layer 1 w0.254: Y1.2 Y1.2@8.468,5.865 ; v1(8.611,5.865) Y1.2@8.468,5.865 ; U1.6 21.385,5.264 8.941,5.264 8.468,5.737 Y1.2@8.468,5.865
  Bottom Layer 1 w0.254: v1(8.611,5.865) 8.677,5.931 8.989,5.931 10.1,7.042 R2.2
XTALC: U1.3 Y2.1 | length 10.6
  Top Layer 1 w0.254: Y2.1 17.895,13.884 19.307,12.472 19.307,7.849 20.044,7.112 21.08,7.112 22.17,8.203 U1.3
XTALD: U1.4 Y2.4 | length 8.7
  Top Layer 1 w0.254: Y2.4 17.895,7.909 19.146,6.658 21.365,6.658 U1.4
pads on no net: J3.4

## Polygon pours and split planes (outlines as drawn)
GND on Top Layer 1 "GND_L01_P000" (solid, pour order 0): 0,0 53.309,0 53.309,22.324 0,22.324
GND on Top Layer "GND_L02_P001" (solid, pour order 1): 0,0 53.309,0 53.309,22.324 0,22.324
+3V3 on Bottom Layer "+3V3_L03_P002" (solid, pour order 2): 0,0 53.309,0 53.309,22.324 0,22.324
GND on Bottom Layer 1 "GND_L04_P003" (solid, pour order 3): 0,0 53.309,0 53.309,22.324 0,22.324